# Altium PCB PCB1.PcbDoc
Units mil, origin at the board's own origin, x right, y up, seen from the top; angles counter-clockwise.
Board outline 3360 x 1765 mil, 2 copper layers (Top Layer, Bottom Layer); 24 components, 11 nets, 86 pads, 0 vias.
Unrouted connection lines stored in the file: 43.
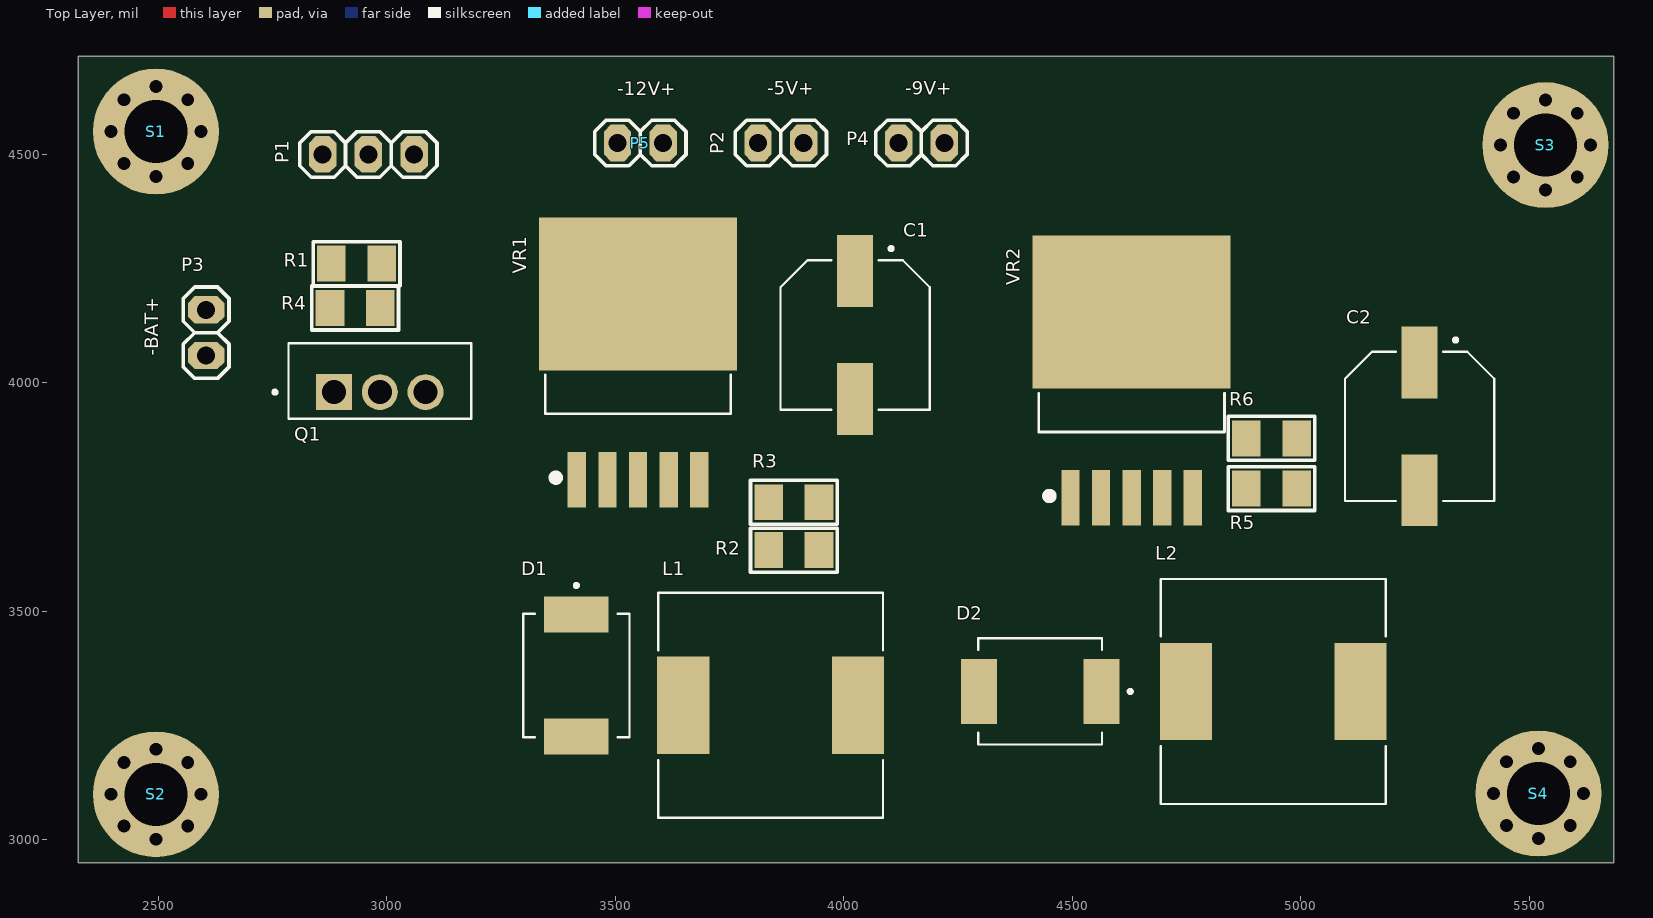
[diagram p0: Top Layer view]
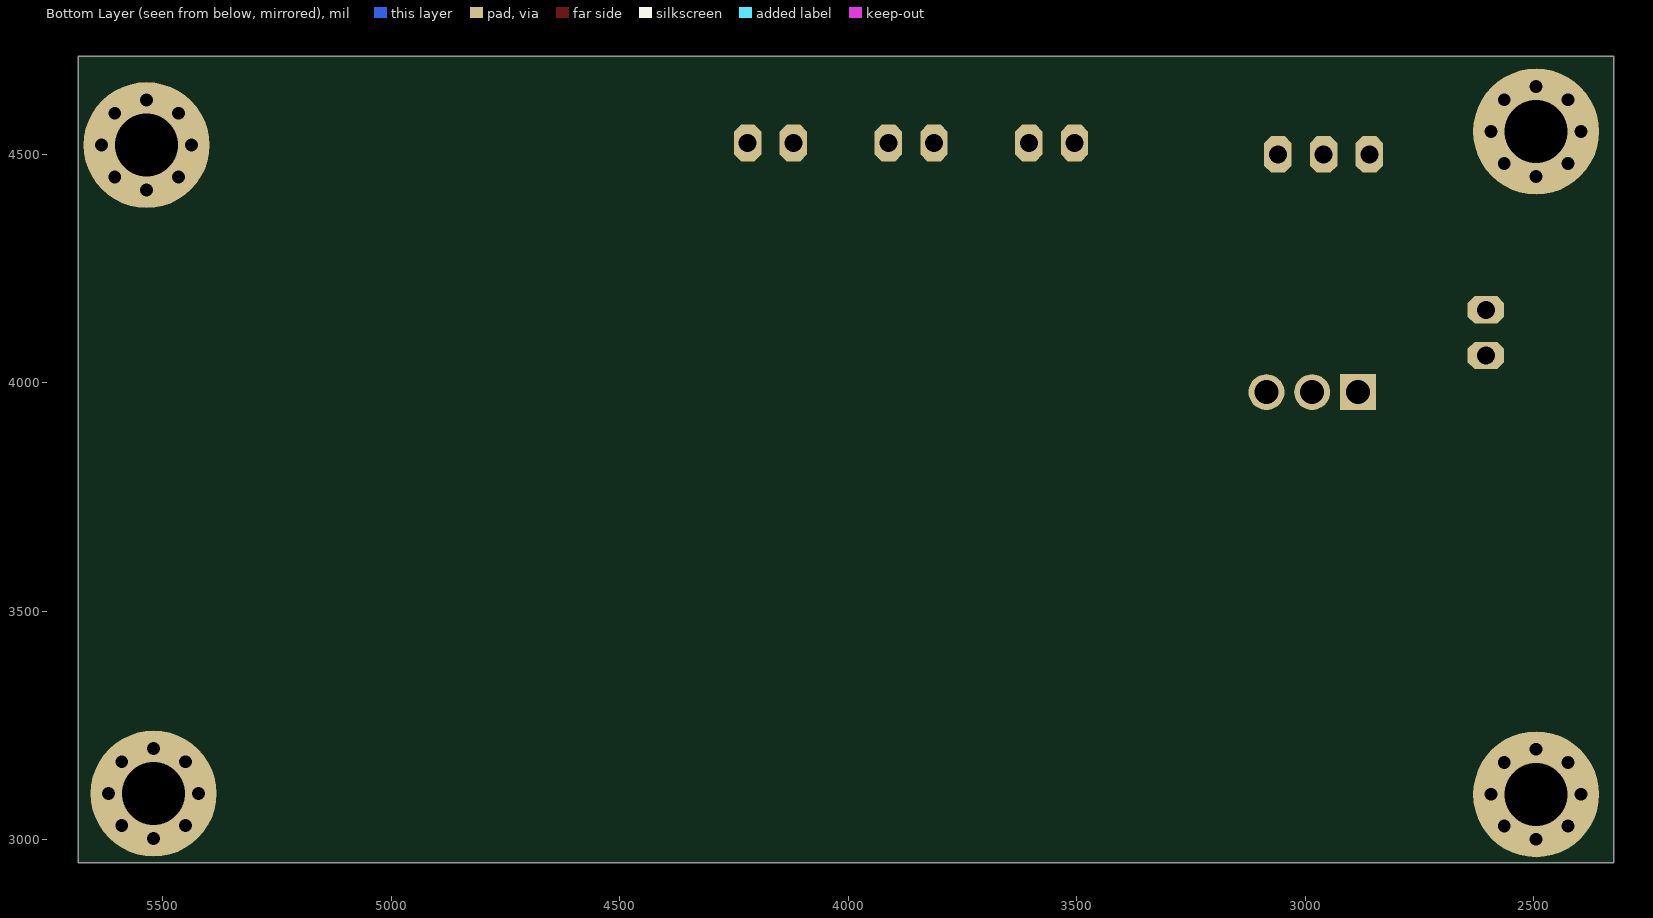
[diagram p1: Bottom Layer view, seen from below]

## Layer stack, top to bottom
Top Solder: solder mask 0.4, Solder Resist, Dk 3.5
Top Layer: signal copper 1.4
Dielectric 1: dielectric 12.6, FR-4, Dk 4.8
Bottom Layer: signal copper 1.4
Bottom Solder: solder mask 0.4, Solder Resist, Dk 3.5

## Board outline
2325,2950 2325,4715 5685,4715 5685,2950

## Design rules (kind name [scope] priority, off if disabled: settings)
Clearance [All] p1: gap=10 ignorepadtopadclearanceinfootprint=FALSE except(0: Arc-Hole Track-Hole SMDPad-Hole THPad-Hole Via-Hole Fill-Hole Poly-Hole Region-Hole Text-Hole)
PolygonConnect [All] p1: connectstyle=Relief reliefconductorwidth=10 reliefentries=4 polygonreliefangle="90 Angle" airgapwidth=10
RoutingVias [All] p1: holewidth=28 width=50 viastyle="Through Hole" minholewidth=28 minwidth=50 maxholewidth=28 maxwidth=50
SolderMaskExpansion [All] p1: expansion=4 istentingtop=FALSE
Width [All] p1: maxlimit=10 minlimit=10 preferedwidth=10
30 further rules are at their usual default settings.

## Components (designator, comment, footprint, x,y, rotation, side; value= is the part's Value field where it differs from the comment)
C1 "Cap 220UF 16V" CAP-220 4025,4105 r270 top
C2 "Cap 220UF 16V" CAP-220 5260,3905 r270 top
D1 "SS34" DIODE-SS34 3415,3360 r270 top
D2 "SS34" DIODE-SS34 4430,3325 r180 top
L1 "SRR1260-330M" INDP125125X600N 3840,3295 r180 top
L2 "SRR1260-330M" INDP125125X600N 4940,3325 r180 top
P1 "Header 3" My_1X03 2960,4500 r0 top
P2 "Header 2" My_1X02 3812.5,4525 r180 top
P3 "Header 2" My_1X02 2605,4160 r90 top
P4 "Header 2" My_1X02 4120,4525 r180 top
P5 "Header 2" My_1X02 3605,4525 r0 top
Q1 "IRFZ44N" TO254P1016X419X2286-3 2985,3980 r0 top
R1 "3.3k" MY_1206 2935,4260 r180 top
R2 "1.2K" MY_1206 3890,3635 r0 top
R3 "3.6K" MY_1206 3890,3740 r0 top
R4 "10k" MY_1206 2930,4165 r0 top
R5 "1.2K" MY_1206 4935,3770 r0 top
R6 "7.5K" MY_1206 4935,3880 r0 top
S1 "Screw" MY_PAD_3MM 2495,4550 r0 top net-tie
S2 "Screw" MY_PAD_3MM 2495,3100 r0 top net-tie
S3 "Screw" MY_PAD_3MM 5535.4,4520.4 r0 top net-tie
S4 "Screw" MY_PAD_3MM 5520,3101.57 r0 top net-tie
VR1 "LM2596S-5.0" TO-263-5 3548.86,3966.14 r270 top
VR2 "LM2596S-5.0" TO-263-5 4628.86,3926.14 r270 top

## Footprints (in the part's own frame and the unit in brackets; to place one, negate y for a bottom-side part, rotate by r counter-clockwise, add the part's x,y. Pads: shape width x height; smd on the part's side, far side on the other; paste and mask are expansions set on the pad)
CAP-220 [mm]
  rect 4x2 smd: 1(-3.55,0) 2(3.55,0)
  silkscreen extent -4.9,-4.15 4.15,4.15, body extent -4.85,-4.15 4.85,4.15, height 10.2
DIODE-SS34 [mm]
  rect 2x3.6 smd: A(3.4,0) C(-3.4,0)
  silkscreen extent -5.1,-2.95 3.44,2.95, body extent -3.98,-2.95 3.98,2.95, height 2.65
INDP125125X600N [mm]
  rect 2.9x5.4 smd: 1(-4.85,0) 2(4.85,0)
  silkscreen extent -6.25,-6.25 6.25,6.25, body extent -6.27,-6.32 6.23,6.18, height 6.29
My_1X02 [mil]
  oct 60x80 hole 39.37: 1(-100,0) 2(0,0)
  silkscreen extent -150,-50 50,50, body extent -150,-51 46,47, height 323
My_1X03 [mil]
  oct 60x80 hole 39.37: 1(-100,0) 2(0,0) 3(100,0)
  silkscreen extent -150,-50 150,50, body extent -149,-49 147,49, height 323
MY_1206 [mm]
  rect 1.6x2 smd: 1(-1.375,-0.025) 2(1.425,-0.025)
  silkscreen extent -2.39,-1.24 2.44,1.19, body extent -1.57,-0.83 1.63,0.77, height 0.59
MY_PAD_3MM [mil]
  round 50 hole 28: 0(-98.43,0) 0(-69.6,-69.6) 0(-69.6,69.6) 0(0,-98.43) 0(0,98.43) 0(69.6,-69.6) 0(69.6,69.6) 0(98.43,0)
  round 275.59 hole 137.8: 0(0,0)
TO254P1016X419X2286-3 [mm]
  rect 1.995x1.995 / inner round 1.995 / far side rect 1.995x1.995 hole 1.33: 1(-2.54,0)
  round 1.995 hole 1.33: 2(0,0) 3(2.54,0)
  silkscreen extent -5.93,-1.48 5.08,2.72, body extent -5.08,-1.47 5.08,2.72, height 22.86
TO-263-5 [mm]
  rect 3.083x1.02 smd: 1(4.507,-3.371) 2(4.507,-1.671) 3(4.507,0.029) 4(4.507,1.729) 5(4.507,3.429)
  rect 8.5x11 smd: 6(-5.813,0.029)
  silkscreen extent -1.31,-5.13 4.6,5.19, body extent -9.19,-4.89 5.41,4.93, height 4.22

## Part data
C1 C2: "CAP ALUM 220UF 20% 25V SMD", LCSC=C970695, Package=DMBJ, MF=Panasonic, MP="RVT1C221M0607 220UF 16V"
D1 D2: "3A, 40V, Schottky Rectifier", LCSC Part=C266556, Package="DO-214AB-2 Taiwan Semiconductor", MF=BORN, MP=SS34
L1 L2: "33 ÂµH Shielded Drum Core, Wirewound Inductor 3 A 60mOhm Max Nonstandard", LCSC=C840528, Package=SMD,12.5x12.5mm, Availability="Not in stock", MF=Bourns, MP=SRR1260-330M, Price=None
P1: "Header, 3-Pin", ASiD Part Number="Header 3-AS"
P2 P3 P4 P5: "Header, 2-Pin", ASiD Part Number="Header 2-AS"
Q1: "N-Channel 55 V 49A (Tc) 94W (Tc) Through Hole TO-220AB", Package="TO-220-3 Infineon", Availability="In Stock", Check_prices=https://www.snapeda.com/parts/IRFZ44N/Infineon+Technologies/view-part/?ref=eda, MF="Infineon Technologies", MP=IRFZ44N, Price=None, Purchase-URL=https://pricing.snapeda.com/search/part/IRFZ44N/?ref=eda, SnapEDA_Link=https://www.snapeda.com/parts/IRFZ44N/Infineon+Technologies/view-part/?ref=snap
R1 R2 R3 R4 R5 R6: library part Res, "Standard resistor", ASiD Part Number=Res-AS
S1 S2 S3 S4: "3mm Screw", ASiD Part Number=Screw-AS
VR1 VR2: "Step-down type Fixed 40V~40V 5V 3A TO-263-5 DC-DC Converters ROHS", LCSC=C116713, Manufacturer="Texas Instruments", Package=TO-263-5, Datasheet=https://datasheet.lcsc.com/lcsc/1809301614_Texas-Instruments-LM2596S-5-0-NOPB_C116713.pdf, MPN=LM2596S-5.0

## Nets (pads, with @x,y where several pads share a name; then routed paths per layer and width w, separated by ;. In a path a pad name is that pad's centre, name@x,y a point inside that pad or via, vN(x,y) a via of type N, cw(c..) or ccw(c..) an arc to the next point about the centre after c; other vN are vias at no path point)
+5V: C1.1 L1.1 P2.1 R3.2
+9V: C2.1 L2.1 P4.1 R6.2
+BAT: P1.1 P3.2 P5.1 VR1.1 VR2.1
GND: C1.2 C2.2 D1.A D2.A P2.2 P4.2 P5.2 Q1.2 R2.2 R4.2 R5.2 S1.0 S2.0 S3.0 S4.0 VR1.3 VR1.5 VR1.6 VR2.3 VR2.5 VR2.6
NetD1_C: D1.C L1.2 VR1.2
NetD2_C: D2.C L2.2 VR2.2
NetP1_2: P1.2 P3.1 Q1.3
NetP1_3: P1.3 R1.1
NetQ1_1: Q1.1 R1.2 R4.1
NetR2_1: R2.1 R3.1 VR1.4
NetR5_1: R5.1 R6.1 VR2.4

## Silkscreen, mask and mechanical layers (free items; w line width, h text height)
Top Overlay:
  text "-5V+" at 3833.17,4620.65 h50
  text "-12V+" at 3505,4620.05 h50
  text "-9V+" at 4135,4620.3 h50
  text "-BAT+" at 2510,4060 h50 r90
Bottom Solder:
  the board outline again, w10